# EAGLE board Cerebro 4.7 (EAGLE 7.3.0)
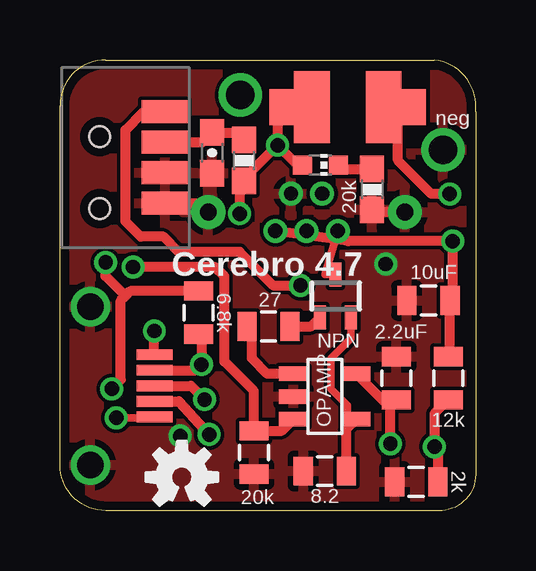
[diagram p0: board, top side]
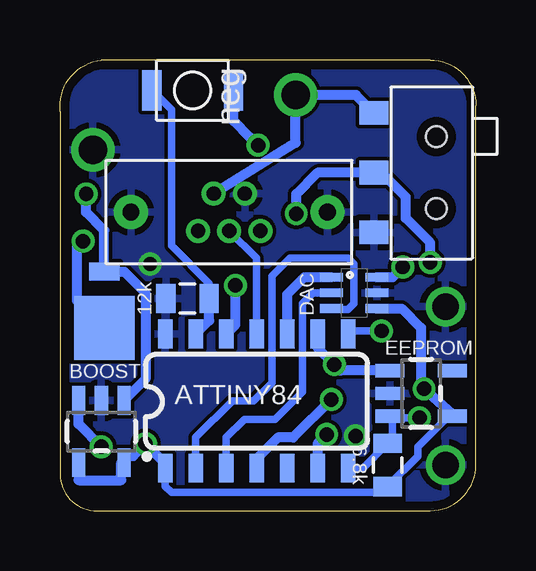
[diagram p1: board, bottom side, seen from below]

Size 17.35 x 18.8 mm. Coordinates in mm from the lower left corner, seen from the top.
Outline: 15.94,0 1.91,0 arc-90 0,1.91 0,16.89 arc-90 1.91,18.8 15.62,18.8 arc-90 17.34,16.64 17.34,1.65 arc-90 15.94,0
Copper layers (1*16): Top 0.0356mm / dielectric 1.5011mm / Bottom 0.0356mm
Design rules "LaenPCBOrder": minimum track width 6mil, minimum drill 13mil, track to track 6mil, track to pad 6mil, pad to pad 6mil, via to via 6mil, smd to smd 6mil, copper to edge 15mil, drill to drill 6mil, minimum pad ring 7mil, minimum via ring 7mil, stop-mask expansion 3mil, vias tented up to drill 0mil, thermal gap 10mil
tRestrict: area 8.6,15.1 to 15.4,18.7

## Footprints (pad centres in the part's own frame; a part is rotated, then mirrored left to right if it is on the bottom)
0603-CAP = smd 1.1 x 1: 1 -0.85,0; 2 0.85,0
0805 = smd 0.8 x 1.2: 1 -0.9,0; 2 0.9,0
POWERMITE = smd 0.762 x 1.27: ANODE 0.699,0 | smd 2.667 x 2.54: CATHODE -1.651,0
SOT23-5 = smd 0.6 x 1.2: 1 -0.95,-1.306; 2 0,-1.306; 3 0.95,-1.306; 4 0.95,1.306; 5 -0.95,1.306
CHIP-LED0603 = smd 0.8 x 0.8: A 0,-0.75; C 0,0.75
MICRO-B-TH = drill 0.6 pad 1: 1 -1.3,-0.775; 2 -0.65,0.775; 3 0,-0.775; 4 0.65,0.775; 5 1.3,-0.775 | drill 0.7 pad 1.422: P$1 -4.1,0; P$2 4.1,0
1812 = smd 1.499 x 2.997: P$1 -1.499,0; P$2 1.499,0 | smd 1.016 x 1.499: P$3 -2.756,0; P$4 2.756,0
SOT23-5' = smd 0.55 x 1.2: 1 -0.95,-1.3; 2 0,-1.3; 3 0.95,-1.3; 4 0.95,1.3; 5 -0.95,1.3
0603-RES = smd 1.1 x 1: 1 -0.85,0; 2 0.85,0
SWITCH-SPDT-SMD = smd 0.991 x 1.194: 1 -2.489,-2.603; 2 0,-2.603; 3 2.489,-2.603 | hole 0.864: -1.499,0; 1.499,0
TSOP6 = smd 0.965 x 1.93: P$1 -1.905,-1.27; P$2 -0.635,-1.27; P$3 0.635,-1.27; P$4 1.905,-1.27
SOT323 = smd 0.5 x 1: 1 0,0.9; 2 -0.65,-0.9; 3 0.65,-0.9
SC-70 = smd 0.36 x 0.95: CS/LD -0.65,-0.95; GND 0,0.95; SCK 0,-0.95; SDI 0.65,-0.95; VCC 0.65,0.95; VOUT -0.65,0.95
SO14 = smd 0.6 x 1.2: 1 -3.81,-2.8; 2 -2.54,-2.8; 3 -1.27,-2.8; 4 0,-2.8; 5 1.27,-2.8; 6 2.54,-2.8; 7 3.81,-2.8; 8 3.81,2.8; 9 2.54,2.8; 10 1.27,2.8; 11 0,2.8; 12 -1.27,2.8; 13 -2.54,2.8; 14 -3.81,2.8
SWITCH_MOMENTARY_XS = smd 0.8 x 1.7: P$1 -1.7,0; P$2 1.7,0
USB_HORZ_MICRO_SMD = drill 1.1: G1 -3.3,0; G2 3.3,0 | smd 0.45 x 1.5: P1 -1.3,2.675; P2 -0.65,2.675; P3 0,2.675; P4 0.65,2.675; P5 1.3,2.675
BATT_TERMINAL = drill 1.2: P$1 0,0

## Placement (x,y rotation side)
C1  .1uF  [0603-CAP]  6.35,14.92 270 top
C3  2.2uF  [0805]  14.03,5.52 90 top
C4  10uF  [0805]  15.37,8.76 180 top
D1  MBRM140T3G  [POWERMITE]  15.49,9.27 90 bottom
IC1  OPA237N  [SOT23-5]  11.05,4.76 270 top
INDICATOR_LED  LED  [CHIP-LED0603]  10.86,14.41 270 top
JP3  USB_MICROB_PLUG-PTH2  [MICRO-B-TH]  10.29,12.45 0 top
L1  10uH  [1812]  12,16.83 180 top
MIC2288  BOOST  [SOT23-5']  15.62,3.3 180 bottom
R1  27  [0805]  8.7,7.68 180 top
R2  8.2  [0805]  11.05,1.65 180 top
R3  2k  [0805]  14.86,1.21 0 top
R4  12k  [0805]  16.19,5.52 90 top
R5  20k  [0603-RES]  13.02,13.4 270 top
R6  6.8k  [0805]  5.78,8.26 90 top
R7  6.8k  [0805]  3.68,1.91 270 bottom
R8  20k  [0805]  8.09,2.43 270 top
R9  12k  [0805]  12.03,8.85 0 bottom
R10  100  [0603-RES]  7.68,14.61 90 top
S3  [SWITCH-SPDT-SMD]  1.65,14.1 270 bottom
SDF  TSOP6238TT  [TSOP6]  3.11,14.73 90 top
T1  FJX3904TF  [SOT323]  11.49,8.95 0 top
U$1  DAC_LTC2630  [SC-70]  5.08,9.08 270 bottom
U$2  ATTINY84  [SO14]  9.14,4.57 0 bottom
U$3  SWITCH-MOMENTARY-NO  [SWITCH_MOMENTARY_XS]  11.81,17.53 0 bottom
U$4  EEPROM24C64A  [SOT23-5']  2.29,4.89 270 bottom
U$5  USB_SOCKET_MICRO_VERTHORIZONTAL  [USB_HORZ_MICRO_SMD]  1.27,5.21 270 top
U$6  [OSHW-LOGO-S]  5.08,1.4 0 top
U$7  BATT_TERMINAL  [BATT_TERMINAL]  15.98,15.05 0 top
U$8  BATT_TERMINAL  [BATT_TERMINAL]  7.52,17.34 0 top

## Library data of the parts
C1 C3 C4 = SparkFun-Capacitors
D1 JP3 L1 MIC2288 R1-R10 S3 SDF U$1 U$3-U$5 U$7 U$8 = Andy-library
IC1 = burr-brown; MF: TEXAS INSTRUMENTS; MPN: OPA237NA/250; OC_FARNELL: 4625298; OC_NEWARK: 35C1874
INDICATOR_LED = led
T1 = zetex; MPN: DSS4160U-7; OC_FARNELL: 1710696; OC_NEWARK: 25R4558
U$2 = SparkFun-DigitalIC; PROD_ID: IC-11285
U$6 = SparkFun-Aesthetics

## Nets
8.68VDC: C4.1 D1.CATHODE JP3.1 R4.2
BATT: C3.1 IC1.5 INDICATOR_LED.A L1.P$2 L1.P$4 MIC2288.4 MIC2288.5 R6.2 R7.2 R10.1 S3.2 U$1.VCC U$2.1 U$3.P$2 U$4.4
GND: C1.2 C3.2 C4.2 IC1.2 JP3.2 JP3.P$1 JP3.P$2 MIC2288.2 R2.2 R3.1 R5.2 R8.2 R9.1 S3.3 SDF.P$1 SDF.P$2 U$1.GND U$2.14 U$4.2 U$5.G1 U$5.G2 U$7.P$1
MISO/TX: U$2.8 U$5.P1
MOSI: R7.1 U$2.7 U$4.3 U$5.P5
N$1: SDF.P$4 U$2.12
N$2: U$1.CS/LD U$2.10
N$3: IC1.3 R8.1 U$1.VOUT
N$4: JP3.4 S3.1 U$8.P$1
N$5: JP3.3 U$2.11
N$6: IC1.4 R2.1 T1.3
N$7: R9.2 U$2.13 U$3.P$1
N$8: INDICATOR_LED.C R5.1
N$9: IC1.1 R1.2
N$10: MIC2288.3 R3.2 R4.1
N$11: R1.1 T1.2
N$12: C1.1 R10.2 SDF.P$3
N$13: JP3.5 T1.1
N$14: U$1.SCK U$2.3
N$15: D1.ANODE L1.P$1 L1.P$3 MIC2288.1
N$16: U$1.SDI U$2.2
RESET: U$2.4 U$5.P3
RX: U$2.6 U$5.P4
SCK: R6.1 U$2.9 U$4.1 U$5.P2

## Tracks (layer width: path | path; a pad name or v marks a point on that pad's centre or on a via)
8.68VDC  (via drill 0.6 pad 0.25)
  Top 0.305: 16.26,8.01 C4.1 | R4.2 16.27,6.73
  Top 0.406: 16.27,6.73 C4.1 16.38,8.88 v16.38,11.24 12.02,11.24 JP3.1
  Bottom 0.305: 16.64,8.76 D1.CATHODE
  Bottom 0.406: 16.64,8.76 16.64,10.99 v16.38,11.24
BATT  (via drill 0.6, 0.6 pad 0.25)
  Top 0.305: 12.5,5.71 IC1.5
  Top 0.406: v1.91,10.35 1.91,9.78 2.73,8.95 | v13.78,2.79 13.78,4.37 | 13.78,4.37 C3.1 | 13.78,4.37 13.7,4.37 IC1.5 | v2.16,5.08 2.54,5.46 2.54,8.76 2.73,8.95 | R6.2 2.93,9.15 2.73,8.95 | v9.08,15.24 7.68,13.84 R10.1 7.49,13.56 v7.49,12.38 | v9.08,15.24 9.91,14.41 INDICATOR_LED.A | 9.08,15.56 v9.08,15.24 | v9.08,15.24 9.08,16.66 L1.P$4 L1.P$2
  Bottom 0.305: 0.99,4.03 U$4.4 1.14,3.94 2.41,2.67 2.41,2.27 R7.2 3.93,0.76 12.7,0.76 12.95,1.02 U$2.1 | 14.79,2 MIC2288.5
  Bottom 0.406: 0.99,4.03 v2.16,5.08 2.29,5.21 2.29,7.62 3.1,8.43 U$1.VCC | MIC2288.4 16.57,1.27 14.79,1.27 14.79,2 | MIC2288.5 14.67,2.28 14.29,2.28 v13.78,2.79 13.08,2.1 12.95,2.1 U$2.1 | v9.08,15.24 9.41,15.56 10.11,16.26 U$3.P$2 | v7.49,12.38 7.49,13.21 6.6,14.1 S3.2 3.94,14.1 2.92,13.08 2.92,12.19 1.91,11.18 v1.91,10.35
GND  (via drill 0.6 pad 0.25)
  Top 0.406: SDF.P$1 5.81,12.83 JP3.P$1 | JP3.P$2 13.12,12.45 R5.2
  other vias: 13.59,10.29 5.02,3.11
  pour Bottom: 44.7,39.24 -18.8,39.24 -18.8,-24.26 44.7,-24.26
  pour Top: -17.91,36.83 45.59,36.83 44.32,-24.13 -19.18,-24.13
MISO/TX  (via drill 0.6 pad 0.25)
  Top 0.305: U$5.P1 3.94,6.64
  Top 0.406: 3.94,6.64 v3.94,7.49
  Bottom 0.305: 5.4,7.43 U$2.8 5.21,7.49 v3.94,7.49
MOSI  (via drill 0.6 pad 0.25)
  Top 0.305: U$5.P5 3.91,3.87 v2.35,3.87
  Bottom 0.305: 5.33,2.19 U$2.7 4.72,1.77 R7.1 3.49,3 3.49,3.85 U$4.3 3.52,3.87 v2.35,3.87
N$1  (via drill 0.6)
  Top 0.406: v10.03,9.4 8.89,9.4 7.49,10.79 4.95,10.79 4.32,11.43 3.37,11.43 2.73,12.06 2.73,15.88 3.49,16.64 SDF.P$4
  Bottom 0.406: U$2.12 10.03,7.75 v10.03,9.4
N$2
  Bottom 0.406: U$2.10 7.87,9.02 7.16,9.73 U$1.CS/LD
N$3  (via drill 0.6)
  Top 0.406: IC1.3 9.26,3.33 R8.1 8.09,4.99 6.86,6.22 6.86,9.78 6.48,10.16 v3.05,10.16
  Bottom 0.406: v3.05,10.16 3.48,9.73 U$1.VOUT
N$4
  Bottom 0.406: JP3.4 7.52,15.34 U$8.P$1 5,17.34 S3.1
N$5
  Bottom 0.305: U$2.11 9.14,10.53 JP3.3
N$6
  Top 0.305: IC1.4 12,3.81 12,4.38 11.3,5.08 11.3,6.35 12.14,7.19 T1.3
  Top 0.406: R2.1 11.95,3.41 IC1.4
N$7
  Bottom 0.305: R9.2 11.13,9.48 12.7,11.05 12.7,16.71 U$3.P$1
  Bottom 0.406: U$2.13 11.13,7.93 R9.2
N$8
  Top 0.406: 12.87,14.1 R5.1 11.46,14.25 INDICATOR_LED.C
N$9
  Top 0.305: IC1.1 9.52,5.71
  Top 0.406: 9.52,5.71 8.64,5.71 8,6.35 8,7.48 R1.2
N$10  (via drill 0.6 pad 0.25)
  Top 0.305: R4.1 16.13,4.69
  Top 0.406: R3.2 15.76,2.53 v15.62,2.67 15.62,4.05 R4.1
  Bottom 0.305: MIC2288.3 16.57,4.57
  Bottom 0.406: v15.62,2.67 16.57,3.62 MIC2288.3
N$11
  Top 0.406: R1.1 10.47,7.68 T1.2
N$12
  Top 0.406: SDF.P$3 5.95,15.37 C1.1 7.37,15.77 R10.2
N$13
  Top 0.305: T1.1 11.06,9.85 JP3.5
N$14
  Bottom 0.305: U$2.3 10.41,3.05 9.65,3.81 8.38,3.81 7.3,4.89 7.24,4.95 7.24,8.64 6.79,9.08 U$1.SCK
N$15  (via drill 0.6 pad 0.3)
  Top 0.406: v16.26,13.21 15.49,13.21 14.1,14.61 14.1,16.23 14.16,16.23 L1.P$3 L1.P$1
  Bottom 0.406: MIC2288.1 13.78,5.49 13.78,9.08 14.67,9.97 D1.ANODE 15.49,11.68 16.26,12.45 v16.26,13.21
N$16
  Bottom 0.305: U$2.2 11.68,3.05 10.16,4.57 9.27,4.57 8.51,5.33 8.51,9.78 7.75,10.54 5.33,10.54 5.08,10.29 5.08,8.64 5.33,8.38 5.98,8.38 U$1.SDI
RESET  (via drill 0.6 pad 0.25)
  Top 0.406: U$5.P3 5.46,5.21 v6.03,4.64
  Bottom 0.406: v6.03,4.64 7.62,3.05 8.25,3.05 9.14,2.16 U$2.4
RX  (via drill 0.6)
  Top 0.406: U$5.P4 4.97,4.56 v6.22,3.17
  Bottom 0.406: v6.22,3.17 6.6,2.79 U$2.6
SCK  (via drill 0.6 pad 0.25)
  Top 0.406: U$5.P2 5.67,5.86 v5.9,6.09 5.9,7.36 R6.1
  Bottom 0.406: U$4.1 5.65,5.84 v5.9,6.09 6.6,6.79 U$2.9

## Text on the board
tNames: neg | Cerebro 4.7 | NPN | OPAMP
bNames: neg | DAC | EEPROM | ATTINY84